# EAGLE board atx_power_control (EAGLE 9.6.1)
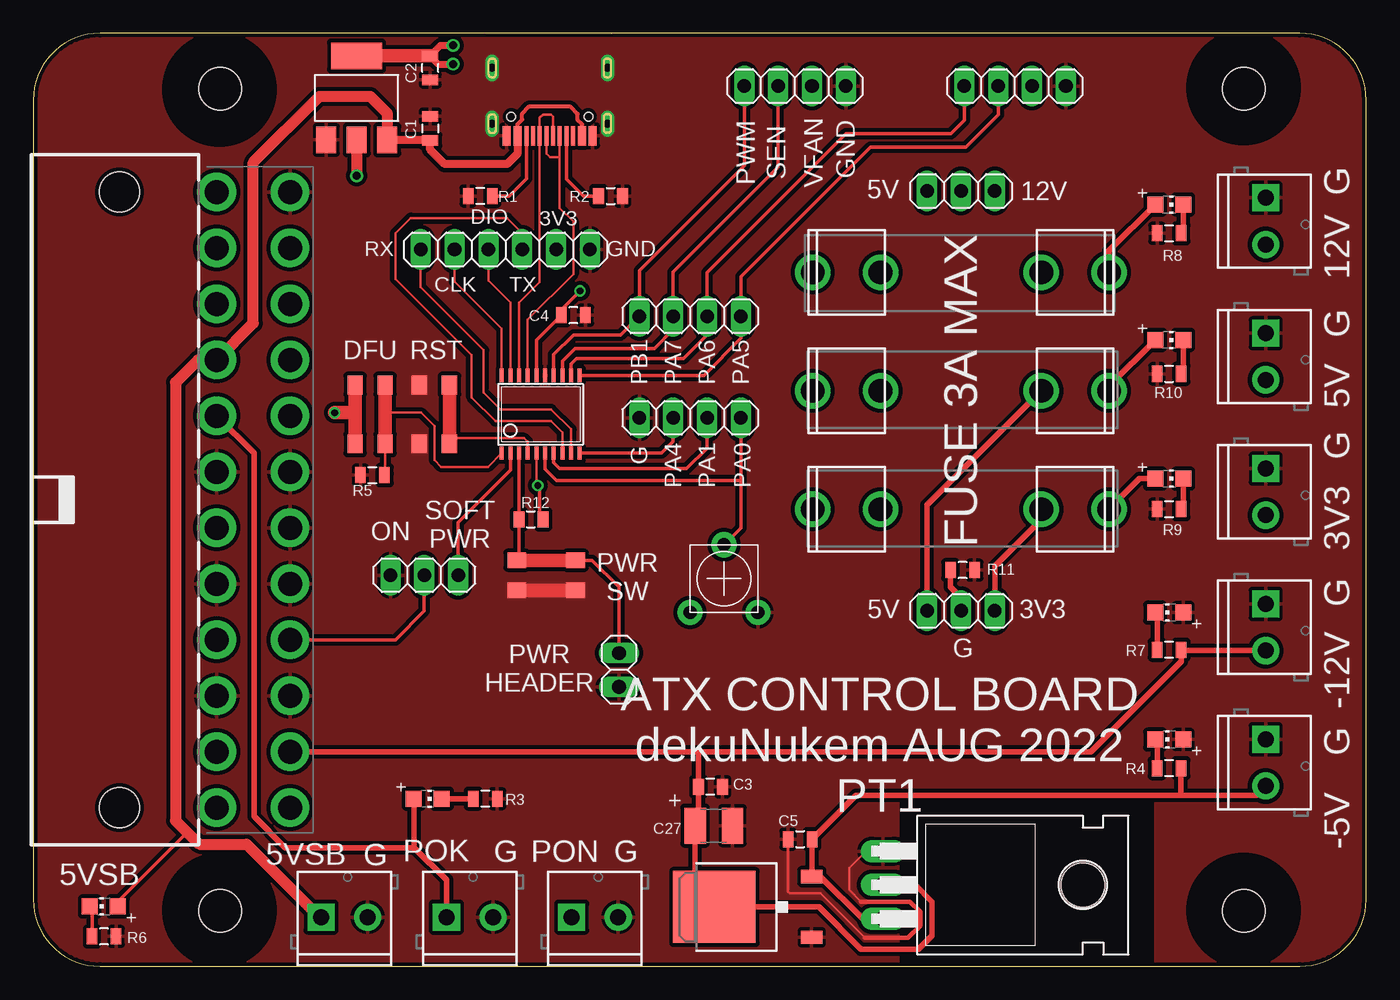
[diagram p0: board, top side]
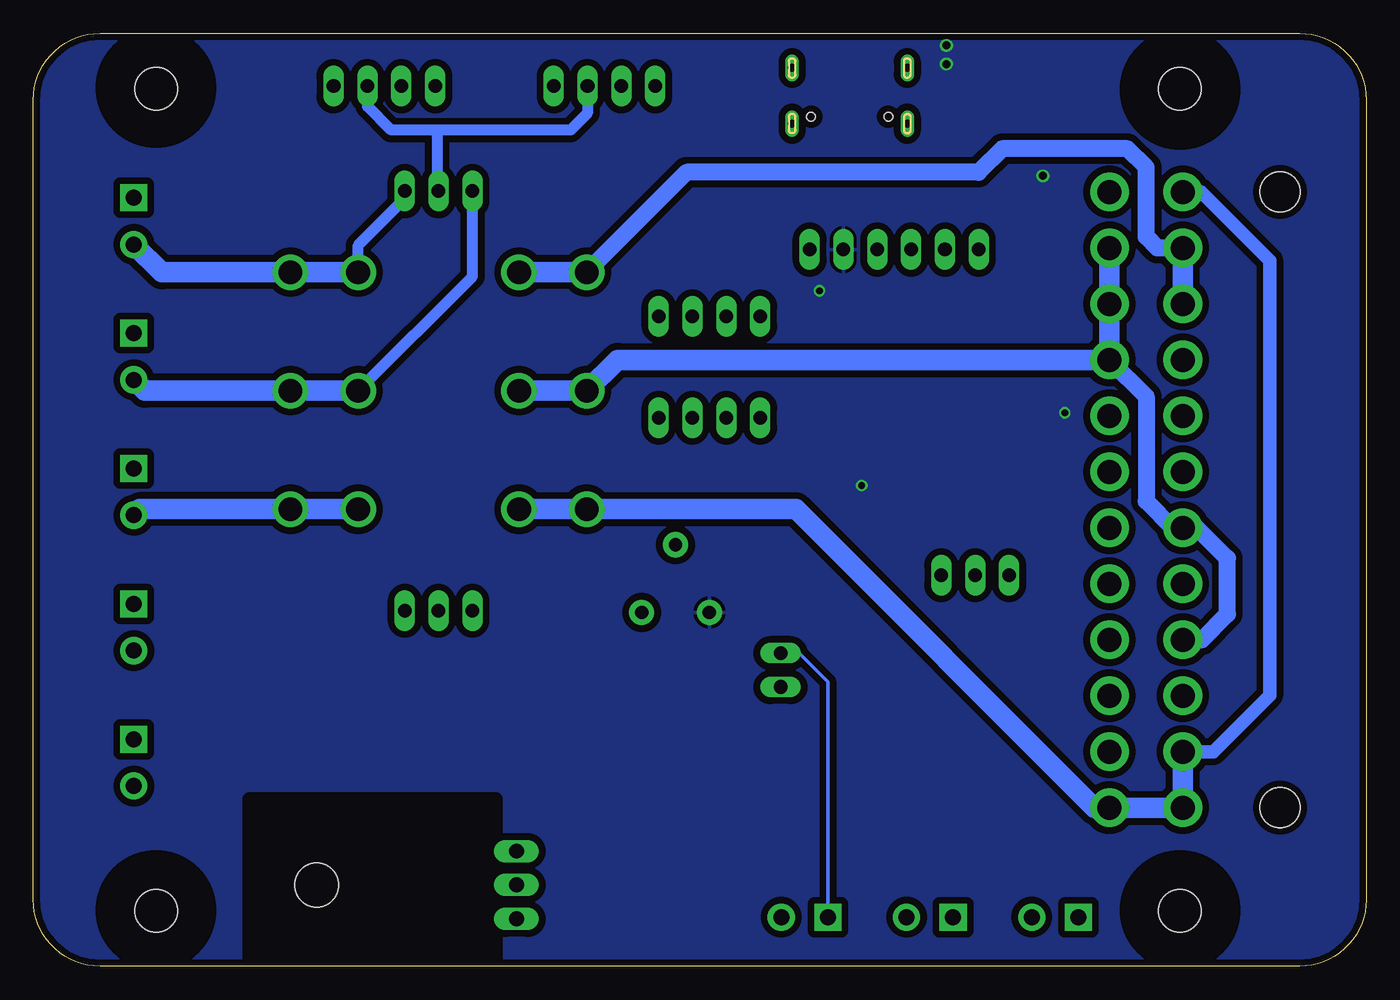
[diagram p1: board, bottom side, seen from below]

Size 100 x 70 mm. Coordinates in mm from the lower left corner, seen from the top.
Outline: 100,5 100,65 arc90 95,70 5,70 arc90 0,65 0,5 arc90 5,0 95,0 arc90 100,5
Copper layers (1*16): Top 0.035mm / dielectric 1.5mm / Bottom 0.035mm
Design rules "deku_2layer_6mil": minimum track width 6mil, minimum drill 15mil, track to track 6mil, track to pad 6mil, pad to pad 6mil, via to via 6mil, smd to smd 6mil, copper to edge 10mil, drill to drill 6mil, minimum pad ring 7mil, minimum via ring 7mil, stop-mask expansion 4mil, vias tented up to drill 25mil, thermal gap 10mil
tRestrict: area 10,0.2 to 18,8.2; area 10,61.8 to 18,69.8; area 86.8,61.9 to 94.8,69.9; area 86.8,0.2 to 94.8,8.2; area 65.3,0 to 83.8,12.6
bRestrict: area 10,0.2 to 18,8.2; area 86.8,0.2 to 94.8,8.2; area 10,61.8 to 18,69.8; area 86.8,61.9 to 94.8,69.9; area 65.3,0 to 83.8,12.6

## Footprints (pad centres in the part's own frame; a part is rotated, then mirrored left to right if it is on the bottom)
0805@1 = smd 0.8 x 1.2: 1 -0.9,0; 2 0.9,0
C1210 = smd 1.6 x 2.7: 1 -1.4,0; 2 1.4,0
FUSE_5MM = drill 1.778: 1 0,-11.113; 2 0,-6.032; 3 0,6.032; 4 0,11.113
TO220H = drill 1.118 long: 1 -2.54,-10.16; 2 0,-10.16; 3 2.54,-10.16 | hole 3.302: 0,4.826
SOT223 = smd 1.499 x 2.007: 1 -2.261,-3.15; 2 0.025,-3.15; 3 2.311,-3.15 | smd 3.81 x 2.007: 4 0,3.15
TSSOP20 = smd 0.305 x 0.991: 1 -2.925,-2.918; 2 -2.275,-2.918; 3 -1.625,-2.918; 4 -0.975,-2.918; 5 -0.325,-2.918; 6 0.325,-2.918; 7 0.975,-2.918; 8 1.625,-2.918; 9 2.275,-2.918; 10 2.925,-2.918; 11 2.925,2.918; 12 2.275,2.918; 13 1.625,2.918; 14 0.975,2.918; 15 0.325,2.918; 16 -0.325,2.918; 17 -0.975,2.918; 18 -1.625,2.918; 19 -2.275,2.918; 20 -2.925,2.918
ADAFRUIT_TO252 = smd 1 x 1.6: 1 -2.28,-4.8; 2 2.28,-4.8 | smd 5.4 x 6.2: 3 0,2.5
ATX24_RIGHT_ANGLE = drill 1.8 pad 2.9: 1 23.1,4.76; 2 18.9,4.76; 3 14.7,4.76; 4 10.5,4.76; 5 6.3,4.76; 6 2.1,4.76; 7 -2.1,4.76; 8 -6.3,4.76; 9 -10.5,4.76; 10 -14.7,4.76; 11 -18.9,4.76; 12 -23.1,4.76; 13 23.1,10.26; 14 18.9,10.26; 15 14.7,10.26; 16 10.5,10.26; 17 6.3,10.26; 18 2.1,10.26; 19 -2.1,10.26; 20 -6.3,10.26; 21 -10.5,10.26; 22 -14.7,10.26; 23 -18.9,10.26; 24 -23.1,10.26 | hole 3: -23.1,-2.54; 23.1,-2.54
SCREWTERMINAL-3.5MM-2 = drill 1.2 pad 2.032 square: 1 0,0 | drill 1.2 pad 2.032: 2 3.5,0
1X04 = drill 1.016 long: 1 -3.81,0; 2 -1.27,0; 3 1.27,0; 4 3.81,0
1X06 = drill 1.016 long: 1 -6.35,0; 2 -3.81,0; 3 -1.27,0; 4 1.27,0; 5 3.81,0; 6 6.35,0
1X03 = drill 1.016 long: 1 -2.54,0; 2 0,0; 3 2.54,0
1X02 = drill 1.016 long: 1 -1.27,0; 2 1.27,0
CHIP-LED0805 = smd 1.2 x 1.2: A 0,-1.05; C 0,1.05
0805 = smd 0.8 x 1.2: 1 -0.9,0; 2 0.9,0
TRIM_POT_PTH = drill 1 pad 1.88: 1 -2.54,-2.54; 2 0,2.54; 3 2.54,-2.54
342_SWICH_FOOT = smd 1.4 x 1.15: P$1 -2.2,-1.125; P$2 -2.2,1.125; P$3 2.2,1.125; P$4 2.2,-1.125
USBC_16P_FOOT = smd 0.6 x 1.45: A1B12 -3.225,3.848; A4B9 -2.425,3.848; B4A9 2.425,3.848; B11A12 3.225,3.848 | smd 0.3 x 1.45: A5 -1.25,3.848; A6 -0.25,3.848; A7 0.25,3.848; A8 1.25,3.848; B5 1.75,3.848; B6 0.75,3.848; B7 -0.75,3.848; B8 -1.75,3.848 | drill 0.6 pad 1 long: P$13 -4.32,2.933; P$14 4.32,2.933; P$15 -4.32,-1.248; P$16 4.32,-1.248 | hole 0.65: -2.89,2.402; 2.89,2.402
M3_MOUNTING_HOLE_PACK = hole 3.2: 0,0

## Placement (x,y rotation side)
C1  1uF  [0805@1]  29.77,62.86 270 top
C2  1uF  [0805@1]  29.77,67.41 90 top
C3  2.2uF  [0805@1]  50.8,13.46 180 top
C4  1uF  [0805@1]  40.51,48.85 180 top
C5  1uF  [0805@1]  57.53,9.53 0 top
C27  47uF  [C1210]  51.05,10.54 0 top
F1  FUSEX20MM  [FUSE_5MM]  69.6,43.18 270 top
F2  FUSEX20MM  [FUSE_5MM]  69.6,52.07 90 top
F3  FUSEX20MM  [FUSE_5MM]  69.6,34.29 270 top
IC1  [TO220H]  73.91,6.1 270 top
IC2  REG1117  [SOT223]  24.25,65.15 0 top
IC3  STM32F042F4  [TSSOP20]  38.07,41.42 0 top
IC4  MY_7905DT  [ADAFRUIT_TO252]  53.59,4.45 90 top
J1  ATX24RH  [ATX24_RIGHT_ANGLE]  9,35 270 top
J2  [SCREWTERMINAL-3.5MM-2]  92.46,37.34 270 top
J3  [SCREWTERMINAL-3.5MM-2]  92.46,27.18 270 top
J4  [SCREWTERMINAL-3.5MM-2]  92.46,17.02 270 top
J6  [SCREWTERMINAL-3.5MM-2]  92.46,57.66 270 top
J7  [SCREWTERMINAL-3.5MM-2]  92.46,47.5 270 top
J8  [SCREWTERMINAL-3.5MM-2]  21.59,3.68 0 top
J9  [SCREWTERMINAL-3.5MM-2]  30.99,3.68 0 top
J10  [SCREWTERMINAL-3.5MM-2]  40.39,3.68 0 top
JP1  [1X04]  73.66,66.04 180 top
JP2  [1X04]  57.15,66.04 180 top
JP3  [1X06]  35.41,53.78 0 top
JP4  [1X03]  69.6,58.17 0 top
JP5  [1X03]  29.34,29.34 180 top
JP6  [1X02]  43.94,22.23 270 top
JP7  [1X04]  49.28,48.77 0 top
JP8  [1X04]  49.28,41.15 0 top
JP9  [1X03]  69.6,26.67 0 top
LED1  [CHIP-LED0805]  85.22,17.02 90 top
LED2  [CHIP-LED0805]  5.29,4.48 90 top
LED3  [CHIP-LED0805]  29.59,12.57 270 top
LED4  [CHIP-LED0805]  85.22,26.54 90 top
LED5  [CHIP-LED0805]  85.22,57.15 270 top
LED6  [CHIP-LED0805]  85.22,36.58 270 top
LED7  [CHIP-LED0805]  85.22,46.99 270 top
R1  5.1K  [0805]  33.53,57.78 180 top
R2  5.1K  [0805]  43.31,57.78 0 top
R3  1K  [0805]  33.91,12.57 180 top
R4  1K  [0805]  85.22,14.86 180 top
R5  5.1K  [0805]  25.45,36.86 0 top
R6  1K  [0805]  5.31,2.24 180 top
R7  5K  [0805]  85.22,23.75 180 top
R8  5K  [0805]  85.22,54.99 0 top
R9  1K  [0805]  85.22,34.29 0 top
R10  1K  [0805]  85.22,44.45 0 top
R11  1K  [0805]  69.72,29.72 180 top
R12  5.1K  [0805]  37.34,33.53 0 top
R13  [TRIM_POT_PTH]  51.82,29.08 0 top
SW1  324_SW  [342_SWICH_FOOT]  38.48,29.34 0 top
SW3  324_SW  [342_SWICH_FOOT]  30.1,41.4 270 top
SW4  324_SW  [342_SWICH_FOOT]  25.27,41.4 270 top
U2  USBC_16P  [USBC_16P_FOOT]  38.75,66.16 180 top
U$1  M3_MOUNTING_HOLE  [M3_MOUNTING_HOLE_PACK]  90.8,4.14 0 top
U$2  M3_MOUNTING_HOLE  [M3_MOUNTING_HOLE_PACK]  14,65.86 0 top
U$3  M3_MOUNTING_HOLE  [M3_MOUNTING_HOLE_PACK]  90.8,65.86 0 top
U$10  M3_MOUNTING_HOLE  [M3_MOUNTING_HOLE_PACK]  14,4.14 0 top

## Library data of the parts
C1-C5 C27 = clock
F1-F3 IC4 = atx_power_control
IC1 = linear
IC2 = clock; MPN: REG1117; OC_FARNELL: 1097566; OC_NEWARK: 14P6981
IC3 = tx
J1 = SparkFun-Connectors
J2-J4 J6-J10 = SparkFun-Connectors; PROD_ID: CONN-08399
JP1-JP9 = pinhead
LED1-LED7 = adafruit
R1 R2 R5 R12 = joyAnalog
R3 R4 R6-R11 = SparkFun-Passives
R13 = SparkFun-Retired; PROD_ID: RES-08445
SW1 SW3 SW4 = 3pos_slide_switch_centered
U2 = my_usbc_16p
U$1-U$3 U$10 = a

## Nets
+3V3: C2.2 C4.2 IC2.2 IC2.4 IC3.5 IC3.16 JP3.5 R12.2 R13.1 SW4.P$1 SW4.P$4
BUTTON1: IC3.4 SW3.P$2 SW3.P$3
BUTTON2: IC3.1 R5.2 SW4.P$2 SW4.P$3
GND: C1.1 C2.1 C3.1 C4.1 C5.1 C27.2 IC1.1 IC2.1 IC3.15 IC4.1 J1.3 J1.5 J1.7 J1.15 J1.17 J1.18 J1.19 J1.24 J2.1 J3.1 J4.1 J6.1 J7.1 J8.2 J9.2 J10.2 JP1.1 JP2.1 JP3.6 JP5.3 JP6.2 JP8.1 LED1.A LED4.A R1.2 R2.2 R3.1 R5.1 R6.1 R8.1 R9.1 R10.1 R11.1 R13.3 SW1.P$1 SW1.P$4 SW3.P$1 SW3.P$4 U2.A1B12 U2.B11A12 U2.P$13 U2.P$14 U2.P$15 U2.P$16
N$1: LED3.C R3.2
N$2: C3.2 C27.1 IC1.2 IC4.3 J1.14 J3.2 R7.1
N$3: IC3.20 JP3.2
N$4: IC3.19 JP3.3
N$5: LED1.C R4.2
N$6: IC3.8 JP3.4
N$7: IC3.9 JP3.1
N$8: LED4.C R7.2
N$9: LED5.C R8.2
N$10: F1.1 F1.2 J1.4 J1.6 J1.21 J1.22 J1.23
N$11: C5.2 IC1.3 IC4.2 J4.2 R4.1
N$12: F3.1 F3.2 J1.1 J1.2 J1.12 J1.13
N$13: F2.3 F2.4 J1.10 J1.11
N$14: IC3.11 JP1.3 JP7.4
N$15: F1.3 F1.4 J7.2 JP4.1 JP9.1 LED7.A
N$16: F2.1 F2.2 J6.2 JP4.3 LED5.A
N$17: JP1.2 JP2.2 JP4.2
N$18: LED6.C R9.2
N$19: F3.3 F3.4 J2.2 JP9.3 LED6.A
N$20: LED7.C R10.2
N$21: IC3.12 JP1.4 JP7.3
N$22: IC3.13 JP2.3 JP7.2
N$23: IC3.14 JP2.4 JP7.1
N$24: IC3.2 JP5.1
N$25: J1.16 JP5.2
N$26: IC3.3 J10.1 JP6.1 R12.1 SW1.P$2 SW1.P$3
N$27: IC3.6 JP8.4 R13.2
N$28: J1.8 J9.1 LED3.A
N$29: LED2.C R6.2
N$30: IC3.7 JP8.3
N$31: R1.1 U2.B5
N$32: IC3.10 JP8.2
N$33: R2.1 U2.A5
N$34: JP9.2 R11.2
USB_DN: IC3.17 U2.A7 U2.B7
USB_DP: IC3.18 U2.A6 U2.B6
VCC: C1.2 IC2.3 J1.9 J8.1 LED2.A U2.A4B9 U2.B4A9

## Tracks (layer width: path | path; a pad name or v marks a point on that pad's centre or on a via)
+3V3  (via drill 0.5, 0.6)
  Top 0.203: IC3.5 37.74,36.17 v37.85,36.07
  Top 0.254: v41.02,50.67 39.61,49.27 C4.2 37.74,46.98 IC3.16 | R12.2 37.97,33.79 37.97,35.94 v37.85,36.07
  Top 0.508: v31.5,69.09 30.55,69.09 C2.2 30.39,67.69 v31.5,67.69
  Top 0.813: IC2.2 24.27,59.32 v24.26,59.31
  Top 1.016: IC2.4 C2.2 | SW4.P$1 24.15,41.53 | 24.15,41.53 SW4.P$4 | v22.61,41.53 24.15,41.53
  pour Bottom (isolate 0.508): 5,70 95,70 arc-90 100,65 100,5 arc-90 95,0 5,0 arc-90 0,5 0,65 arc-90
BUTTON1
  Top 0.203: IC3.4 37.09,39.36 36.83,39.62 31.65,39.62 SW3.P$3
  Top 1.016: SW3.P$2 SW3.P$3
BUTTON2
  Top 0.203: IC3.1 34.11,37.47 30.61,37.47 30.1,37.97 30.1,40.51 29.08,41.53 26.4,41.53 | SW4.P$3 26.4,37 26.45,36.95
  Top 0.61: 26.45,36.95 R5.2
  Top 1.016: SW4.P$2 26.4,41.53 SW4.P$3
GND
  Top 0.203: IC1.1 62.48,8.64 61.21,7.37 61.21,5.71 62.1,4.83 | C5.1 56.63,5.6 56.77,5.46 59.05,5.46 62.38,2.13
  Top 0.356: 62.38,2.13 65.63,2.13 66.55,3.05 66.55,4.06 65.79,4.83 62.1,4.83
  Top 1.016: SW1.P$1 SW1.P$4
  pour Top (isolate 0.305): 100,5 100,65 arc90 95,70 5,70 arc90 0,65 0,5 arc90 5,0 95,0 arc90
N$1
  Top 0.406: LED3.C R3.2
N$2
  Top 0.406: IC1.2 66.17,6.1 67.44,4.83 67.44,2.29 66.42,1.27 62.1,1.27 58.93,4.45 IC4.3 49.65,5.88 C27.1 49.9,10.79 C3.2 49.9,16.1 | J1.14 49.9,16.1 | 86.12,23.62 86.12,22.87 79.35,16.1 49.9,16.1 | 86.12,23.62 R7.1 | J3.2 86.17,23.68 86.12,23.62
N$3
  Top 0.203: JP3.2 31.61,51.37 35.14,47.83 IC3.20
N$4
  Top 0.203: JP3.3 34.15,51.45 35.79,49.8 IC3.19
N$5
  Top 0.406: LED1.C 84.32,16.87 R4.2
N$6
  Top 0.203: IC3.8 39.69,40.06 38.86,40.89 34.67,40.89 32.89,42.67 32.89,45.85 27.18,51.56 27.18,54.99 28.32,56.13 35.56,56.13 36.69,55.01 JP3.4
N$7
  Top 0.203: IC3.9 40.34,40.3 38.86,41.78 35.05,41.78 33.78,43.05 33.78,46.23 29.07,50.95 JP3.1
N$8
  Top 0.406: LED4.C 84.32,26.39 R7.2
N$9
  Top 0.406: LED5.C 86.27,55.14 R8.2
N$10
  Bottom 1.27: J1.4 12.33,24.5 10.41,26.42 10.41,30.61 12.71,32.9 J1.6 14.52,32.9 16.51,34.89 16.51,42.75 J1.21
  Bottom 1.524: F1.2 F1.1 56.16,45.5 J1.21 J1.22 J1.23
N$11
  Top 0.406: IC1.3 62.23,3.56 59.06,6.72 IC4.2 58.43,6.76 C5.2 61.72,12.83 86.11,12.83 | J4.2 91.77,12.83 86.11,12.83 | 86.11,12.83 86.11,14.85 R4.1
N$12
  Bottom 1.016: J1.12 12.38,58.1 7.24,52.96 7.24,20.34 11.47,16.1 J1.2
  Bottom 1.524: J1.2 J1.1 J1.13 20.41,11.9 42.8,34.29 F3.1 F3.2
N$13
  Bottom 1.27: J1.11 15.67,53.9 16.51,54.74 16.51,59.94 17.91,61.34 27.3,61.34 29.08,59.56 50.99,59.56 F2.4
  Bottom 1.524: J1.10 J1.11 | F2.4 F2.3
N$14
  Top 0.254: JP1.3 72.39,63.88 69.98,61.47 62.79,61.47 53.09,51.76 JP7.4 53.09,47.12 50.3,44.33 IC3.11
N$15
  Top 0.406: LED7.A 80.71,43.53 F1.4 | F1.3 67.06,34.61 JP9.1
  Bottom 0.813: JP4.1 67.06,51.75 F1.3
  Bottom 1.524: F1.3 F1.4 91.64,43.18 J7.2
N$16
  Top 0.406: LED5.A 80.71,53.69 F2.1
  Bottom 0.813: F2.2 75.63,54.1 72.14,57.59 JP4.3
  Bottom 1.524: F2.2 F2.1 90.37,52.07 J6.2
N$17
  Bottom 0.813: JP1.2 74.93,64.52 73.15,62.74 69.72,62.74 | JP2.2 58.42,64.01 59.69,62.74 69.72,62.74 | 69.72,62.74 69.72,58.29 JP4.2
N$18
  Top 0.406: LED6.C 86.27,34.44 R9.2
N$19
  Top 0.406: LED6.A 83,36.58 F3.4 | F3.3 75.63,33.53 72.14,30.04 JP9.3
  Bottom 1.524: F3.3 F3.4 92,34.29 J2.2
N$20
  Top 0.406: LED7.C 86.27,44.6 R10.2
N$21
  Top 0.254: JP1.4 69.85,63.5 68.83,62.48 60.98,62.48 50.55,52.05 JP7.3 50.55,47.37 48.77,45.59 40.77,45.59 40.34,45.17 IC3.12
N$22
  Top 0.254: IC3.13 39.69,45.41 40.64,46.35 46.61,46.35 48.01,47.75 JP7.2 48.01,52.07 55.88,59.94 JP2.3
N$23
  Top 0.254: IC3.14 39.04,45.9 40.51,47.37 44.07,47.37 JP7.1 45.47,52.2 53.34,60.07 JP2.4
N$24
  Top 0.254: JP5.1 31.86,29.36 31.86,33.29 35.79,37.23 IC3.2
N$25
  Top 0.254: JP5.2 29.34,26.67 27.17,24.5 J1.16
N$26
  Top 0.254: SW1.P$3 41.93,30.46 43.94,28.45 JP6.1 | IC3.3 R12.1 36.44,30.62 SW1.P$2
  Top 1.016: SW1.P$2 SW1.P$3
  Bottom 0.254: JP6.1 42.55,23.5 40.39,21.34 J10.1
N$27
  Top 0.254: IC3.6 38.39,37.3 39.24,36.45 53.09,36.45 | JP8.4 53.09,36.45 | 53.09,36.45 53.09,32.89 R13.2
N$28
  Top 0.406: J1.8 16.56,38.5 16.56,11.23 18.9,8.89 28.57,8.89 | LED3.A 28.57,12.54 28.57,8.89 | J9.1 30.99,6.48 28.57,8.89
N$29
  Top 0.254: LED2.C 4.41,4.31 R6.2
N$30
  Top 0.254: IC3.7 39.04,37.79 39.5,37.34 49.02,37.34 50.55,38.86 JP8.3
N$31
  Top 0.254: U2.B5 37,59.1 35.69,57.78 R1.1
N$32
  Top 0.254: IC3.10 47.13,38.5 48.01,39.37 JP8.2
N$33
  Top 0.254: U2.A5 40,59.06 41.27,57.78 R2.1
N$34
  Top 0.406: JP9.2 69.6,27.69 68.82,28.46 R11.2
USB_DN
  Top 0.203: U2.A7 38.5,60.96 38.75,60.71 39.5,60.71 | IC3.17 37.09,48.52 40.51,51.94 40.51,55.88 39.5,56.89 39.5,60.71 | U2.B7 39.5,60.71
USB_DP
  Top 0.203: U2.A6 39,63.74 38.86,63.88 38.23,63.88 38,63.65 U2.B6 38,51.33 36.44,49.78 IC3.18
VCC
  Top 0.254: LED2.A 6.34,4.81 11.56,10.03
  Top 0.305: U2.A4B9 41.17,63.17 40.84,63.5 40.84,63.93 40.26,64.52 37.21,64.52 36.68,63.98 36.68,63.52 36.32,63.17 U2.B4A9
  Top 0.61: U2.B4A9 36.32,60.96 35.56,60.2 30.86,60.2 29.77,61.29 C1.2 26.59,61.97 IC2.3
  Top 0.813: IC2.3 26.56,63.99 25.27,65.28 21.46,65.28 16.51,60.33 16.51,48.25 J1.9 12.36,45.5 10.67,43.8 10.67,10.92 11.56,10.03 12.45,9.14 16,9.14 21.46,3.68 J8.1

## Text on the board
tNames: PWM | SEN | VFAN | GND | G | 5V | 12V | DIO | 3V3 | RX | GND | 12V | CLK | TX | G | DFU | RST | PB1 | PA7 | PA6 | PA5 | 5V | FUSE 3A MAX | G | G | PA4 | PA1 | PA0 | 3V3 | ON | SOFT / PWR | PWR / SW | G | 5V | 3V3 | G | PWR / HEADER | -12V | ATX CONTROL BOARD / dekuNukem AUG 2022 / PT1 | G | -5V | POK | G | PON | G | 5VSB | G | 5VSB